# EAGLE board NuEVI (EAGLE 7.6.0)
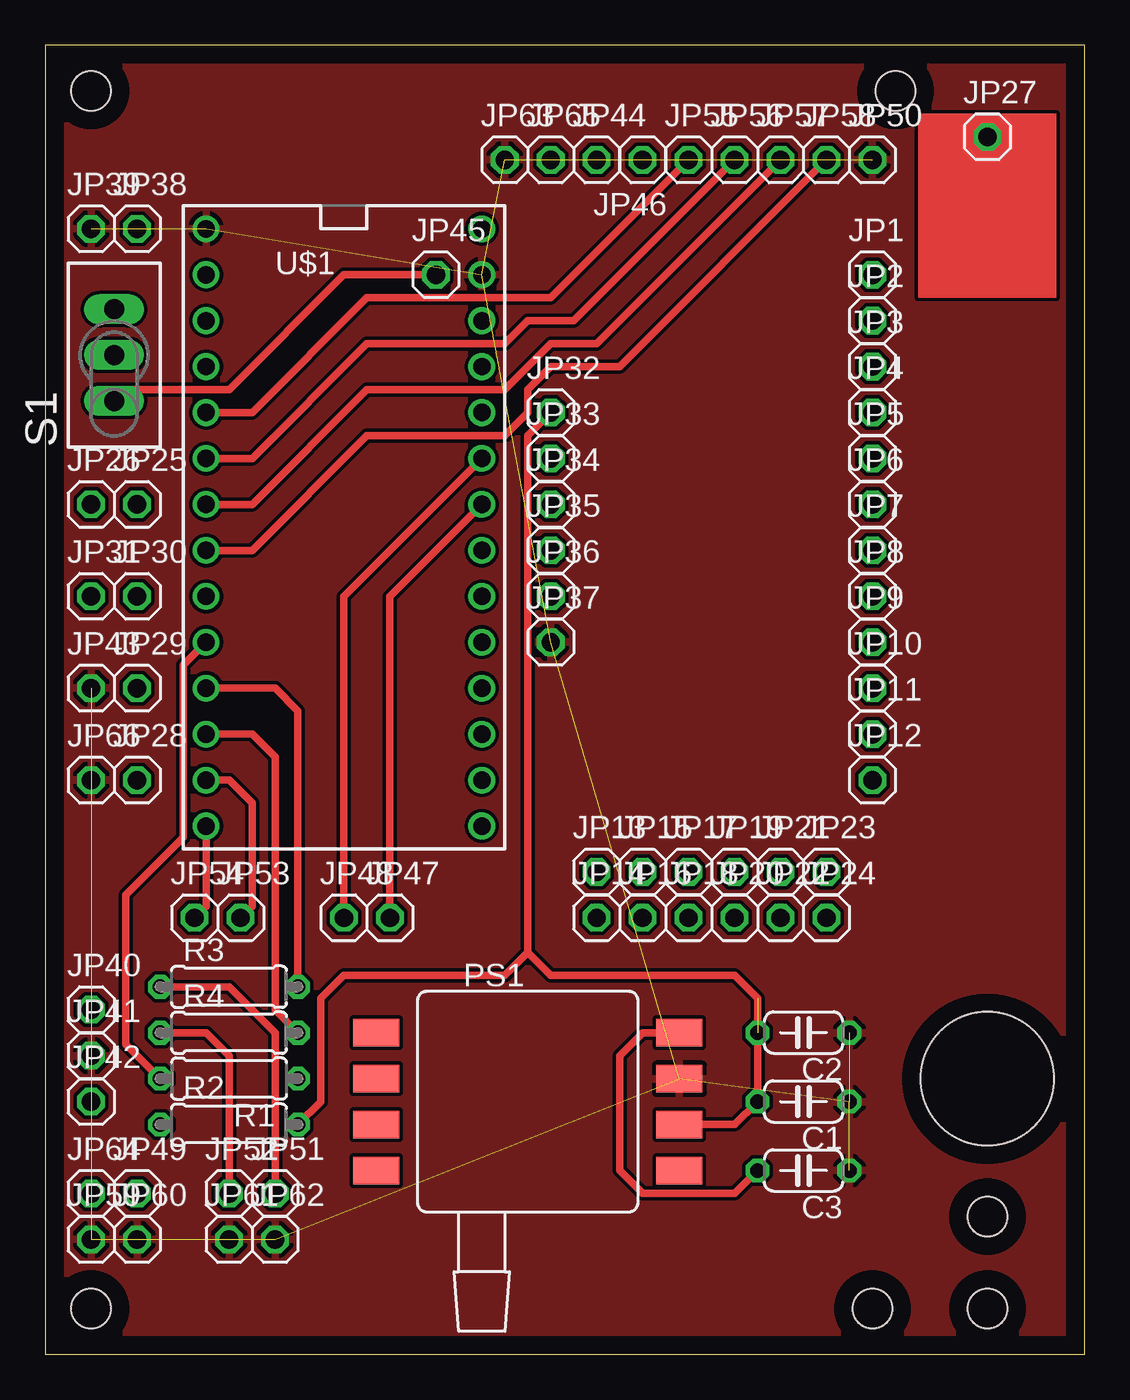
[diagram p0: board, top side]
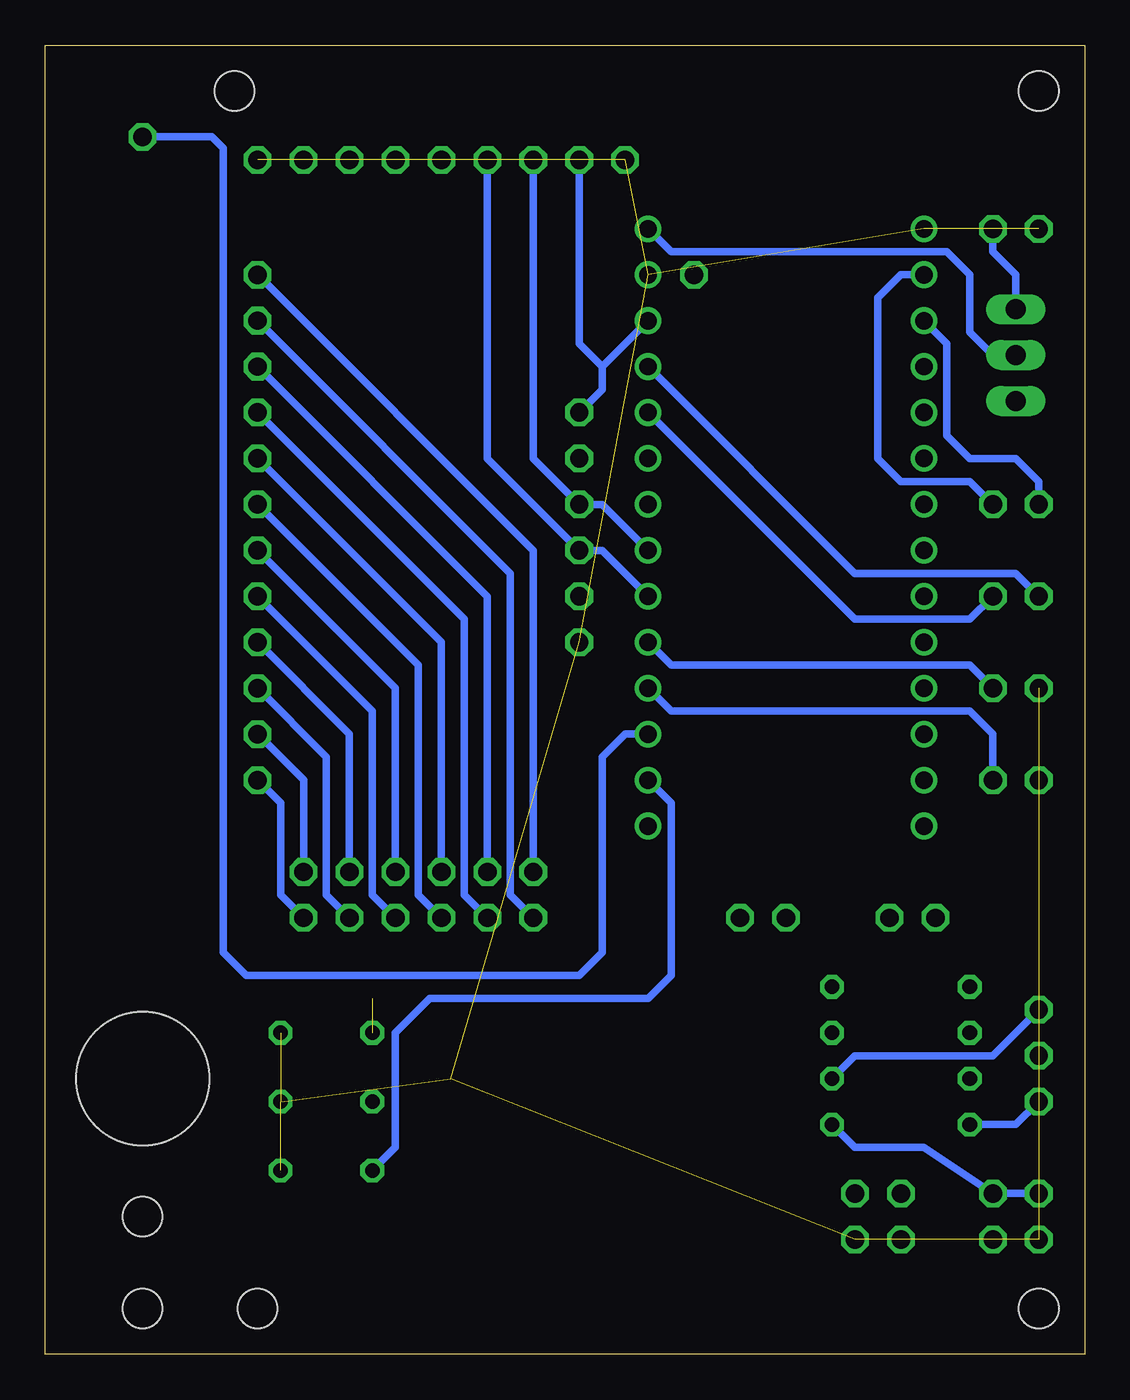
[diagram p1: board, bottom side, seen from below]

Size 57.45 x 72.38 mm. Coordinates in mm from the lower left corner, seen from the top.
Outline: 0,0 57.45,0 57.45,72.38 0,72.38 0,0
Copper layers (1*16): Top 0.035mm / dielectric 1.5mm / Bottom 0.035mm
Design rules "default": minimum track width 10mil, minimum drill 24mil, track to track 8mil, track to pad 8mil, pad to pad 8mil, via to via 8mil, smd to smd 8mil, copper to edge 40mil, drill to drill 8mil, minimum pad ring 10mil, minimum via ring 8mil, stop-mask expansion 4mil, vias tented up to drill 0mil, thermal gap 10mil
Holes 2.2 mm at 2.54,69.85 46.99,69.85 2.54,2.54 45.72,2.54 52.07,2.54 52.07,7.62
Holes 7.37 mm at 52.07,15.24

## Footprints (pad centres in the part's own frame; a part is rotated, then mirrored left to right if it is on the bottom)
C050-024X044 = drill 0.813 octagon: 1 -2.54,0; 2 2.54,0
1X01 = drill 1.016 octagon: 1 0,0
1369 = smd 2.54 x 1.524: 1 8.382,-3.81; 2 8.382,-1.27; 3 8.382,1.27; 4 8.382,3.81; 5 -8.382,3.81; 6 -8.382,1.27; 7 -8.382,-1.27; 8 -8.382,-3.81
0207/7 = drill 0.813 octagon: 1 -3.81,0; 2 3.81,0
TL3XPO = drill 1.1 pad 1.422 long: 1 -2.54,0; 2 0,0; 3 2.54,0
TEENSY_3.0-3.2&LC_DIL = drill 0.965: 0 -7.62,13.97; 1 -7.62,11.43; 2 -7.62,8.89; 3 -7.62,6.35; 3.3V 7.62,11.43; 4 -7.62,3.81; 5 -7.62,1.27; 6 -7.62,-1.27; 7 -7.62,-3.81; 8 -7.62,-6.35; 9 -7.62,-8.89; 10 -7.62,-11.43; 11 -7.62,-13.97; 12 -7.62,-16.51; 13 7.62,-16.51; 14/A0 7.62,-13.97; 15/A1 7.62,-11.43; 16/A2 7.62,-8.89; 17/A3 7.62,-6.35; 18/A4 7.62,-3.81; 19/A5 7.62,-1.27; 20/A6 7.62,1.27; 21/A7 7.62,3.81; 22/A8 7.62,6.35; 23/A9 7.62,8.89; AGND 7.62,13.97; GND -7.62,16.51; VIN 7.62,16.51

## Placement (x,y rotation side)
C1  0.01uF  [C050-024X044]  41.91,13.97 180 top
C2  1uF  [C050-024X044]  41.91,17.78 180 top
C3  470pF  [C050-024X044]  41.91,10.16 180 top
JP1  [1X01]  45.72,59.69 0 top
JP2  [1X01]  45.72,57.15 0 top
JP3  [1X01]  45.72,54.61 0 top
JP4  [1X01]  45.72,52.07 0 top
JP5  [1X01]  45.72,49.53 0 top
JP6  [1X01]  45.72,46.99 0 top
JP7  [1X01]  45.72,44.45 0 top
JP8  [1X01]  45.72,41.91 0 top
JP9  [1X01]  45.72,39.37 0 top
JP10  [1X01]  45.72,36.83 0 top
JP11  [1X01]  45.72,34.29 0 top
JP12  [1X01]  45.72,31.75 0 top
JP13  [1X01]  30.48,26.67 0 top
JP14  [1X01]  30.48,24.13 0 top
JP15  [1X01]  33.02,26.67 0 top
JP16  [1X01]  33.02,24.13 0 top
JP17  [1X01]  35.56,26.67 0 top
JP18  [1X01]  35.56,24.13 0 top
JP19  [1X01]  38.1,26.67 0 top
JP20  [1X01]  38.1,24.13 0 top
JP21  [1X01]  40.64,26.67 0 top
JP22  [1X01]  40.64,24.13 0 top
JP23  [1X01]  43.18,26.67 0 top
JP24  [1X01]  43.18,24.13 0 top
JP25  [1X01]  5.08,46.99 0 top
JP26  [1X01]  2.54,46.99 0 top
JP27  [1X01]  52.07,67.31 0 top
JP28  [1X01]  5.08,31.75 0 top
JP29  [1X01]  5.08,36.83 0 top
JP30  [1X01]  5.08,41.91 0 top
JP31  [1X01]  2.54,41.91 0 top
JP32  [1X01]  27.94,52.07 0 top
JP33  [1X01]  27.94,49.53 0 top
JP34  [1X01]  27.94,46.99 0 top
JP35  [1X01]  27.94,44.45 0 top
JP36  [1X01]  27.94,41.91 0 top
JP37  [1X01]  27.94,39.37 0 top
JP38  [1X01]  5.08,62.23 0 top
JP39  [1X01]  2.54,62.23 0 top
JP40  [1X01]  2.54,19.05 0 top
JP41  [1X01]  2.54,16.51 0 top
JP42  [1X01]  2.54,13.97 0 top
JP43  [1X01]  2.54,36.83 0 top
JP44  [1X01]  30.48,66.04 0 top
JP45  [1X01]  21.59,59.69 0 top
JP46  [1X01]  33.02,66.04 180 top
JP47  [1X01]  19.05,24.13 0 top
JP48  [1X01]  16.51,24.13 0 top
JP49  [1X01]  5.08,8.89 0 top
JP50  [1X01]  45.72,66.04 0 top
JP51  [1X01]  12.7,8.89 0 top
JP52  [1X01]  10.16,8.89 0 top
JP53  [1X01]  10.79,24.13 0 top
JP54  [1X01]  8.26,24.13 0 top
JP55  [1X01]  35.56,66.04 0 top
JP56  [1X01]  38.1,66.04 0 top
JP57  [1X01]  40.64,66.04 0 top
JP58  [1X01]  43.18,66.04 0 top
JP59  [1X01]  2.54,6.35 0 top
JP60  [1X01]  5.08,6.35 0 top
JP61  [1X01]  10.16,6.35 0 top
JP62  [1X01]  12.7,6.35 0 top
JP63  [1X01]  25.4,66.04 0 top
JP64  [1X01]  2.54,8.89 0 top
JP65  [1X01]  27.94,66.04 0 top
JP66  [1X01]  2.54,31.75 0 top
PS1  [1369]  26.67,13.97 0 top
R1  47  [0207/7]  10.16,15.24 180 top
R2  47  [0207/7]  10.16,12.7 0 top
R3  47  [0207/7]  10.16,20.32 0 top
R4  47  [0207/7]  10.16,17.78 0 top
S1  TL36PO  [TL3XPO]  3.81,55.24 90 top
U$1  TEENSY_LC_DIL  [TEENSY_3.0-3.2&LC_DIL]  16.51,45.72 0 top

## Library data of the parts
C1-C3 = rcl
JP1-JP66 = pinhead
PS1 = mpx-freescale
R1-R4 = resistor
S1 = switch
U$1 = Teensy_3_and_LC_Series_Boards_v1.4

## Nets
GND: C1.1 C2.1 C3.1 JP37.1 JP39.1 JP41.1 JP43.1 JP50.1 JP59.1 JP60.1 JP61.1 JP62.1 JP63.1 JP66.1 PS1.3 U$1.AGND U$1.GND
N$1: JP1.1 JP13.1
N$2: JP2.1 JP14.1
N$3: JP3.1 JP15.1
N$4: JP4.1 JP16.1
N$5: JP5.1 JP17.1
N$6: JP6.1 JP18.1
N$8: JP7.1 JP19.1
N$9: JP8.1 JP20.1
N$10: JP9.1 JP21.1
N$11: JP10.1 JP22.1
N$12: JP11.1 JP23.1
N$13: JP25.1 U$1.0
N$14: JP12.1 JP24.1
N$15: JP26.1 U$1.1
N$16: JP27.1 U$1.15/A1
N$17: JP28.1 U$1.16/A2
N$18: JP29.1 U$1.17/A3
N$19: JP30.1 U$1.22/A8
N$20: JP31.1 U$1.23/A9
N$21: C1.2 C2.2 JP32.1 JP49.1 JP64.1 JP65.1 PS1.2 R2.2 U$1.3.3V
N$22: JP47.1 U$1.20/A6
N$23: JP34.1 JP44.1 U$1.19/A5
N$24: JP35.1 JP46.1 U$1.18/A4
N$25: JP38.1 S1.3
N$26: R1.2 U$1.8
N$27: JP40.1 R1.1
N$28: JP42.1 R2.1
N$29: C3.2 PS1.4 U$1.14/A0
N$30: S1.2 U$1.VIN
N$31: JP48.1 U$1.21/A7
N$32: JP51.1 R3.1
N$33: JP52.1 R4.1
N$34: JP53.1 U$1.11
N$35: JP54.1 U$1.12
N$36: JP55.1 U$1.3
N$37: JP56.1 U$1.4
N$38: JP57.1 U$1.5
N$39: JP58.1 U$1.6
N$40: JP45.1 S1.1
N$41: R4.2 U$1.10
N$43: R3.2 U$1.9

## Tracks (layer width: path | path; a pad name or v marks a point on that pad's centre or on a via)
GND  (16 unrouted)
  pour Top: 0,72.39 57.78,72.39 57.78,0 0,0
N$1
  Bottom 0.406: JP13.1 30.48,44.45 JP1.1
N$2
  Bottom 0.406: JP14.1 31.75,25.4 31.75,43.18 JP2.1
N$3
  Bottom 0.406: JP15.1 33.02,41.91 JP3.1
N$4
  Bottom 0.406: JP16.1 34.29,25.4 34.29,40.64 JP4.1
N$5
  Bottom 0.406: JP17.1 35.56,39.37 JP5.1
N$6
  Bottom 0.406: JP18.1 36.83,25.4 36.83,38.1 JP6.1
N$8
  Bottom 0.406: JP19.1 38.1,36.83 JP7.1
N$9
  Bottom 0.406: JP20.1 39.37,25.4 39.37,35.56 JP8.1
N$10
  Bottom 0.406: JP21.1 40.64,34.29 JP9.1
N$11
  Bottom 0.406: JP22.1 41.91,25.4 41.91,33.02 JP10.1
N$12
  Bottom 0.406: JP23.1 43.18,31.75 JP11.1
N$13
  Bottom 0.406: JP25.1 6.35,48.26 10.16,48.26 11.43,49.53 11.43,58.42 10.16,59.69 U$1.0
N$14
  Bottom 0.406: JP24.1 44.45,25.4 44.45,30.48 JP12.1
N$15
  Bottom 0.406: U$1.1 7.62,55.88 7.62,50.8 6.35,49.53 3.81,49.53 2.54,48.26 JP26.1
N$16
  Bottom 0.406: U$1.15/A1 25.4,34.29 26.67,33.02 26.67,22.23 27.94,20.95 46.35,20.95 47.62,22.23 47.62,66.67 48.26,67.31 JP27.1
N$17
  Bottom 0.406: U$1.16/A2 22.86,35.56 6.35,35.56 5.08,34.29 JP28.1
N$18
  Bottom 0.406: JP29.1 6.35,38.1 22.86,38.1 U$1.17/A3
N$19
  Bottom 0.406: JP30.1 6.35,40.64 12.7,40.64 U$1.22/A8
N$20
  Bottom 0.406: JP31.1 3.81,43.18 12.7,43.18 U$1.23/A9
N$21  (1 unrouted)
  Top 0.406: JP32.1 26.67,50.8 26.67,22.23 | R2.2 15.24,13.97 15.24,19.68 16.51,20.95 25.4,20.95 26.67,22.23 | PS1.2 38.1,12.7 C1.2 39.37,19.68 38.1,20.95 27.94,20.95 26.67,22.23
  Bottom 0.406: U$1.3.3V 26.67,54.61 | 26.67,54.61 26.67,53.34 JP32.1 | JP65.1 27.94,55.88 26.67,54.61 | R2.2 12.7,11.43 8.89,11.43 JP49.1 JP64.1
N$22
  Top 0.406: U$1.20/A6 19.05,41.91 JP47.1
N$23
  Bottom 0.406: U$1.19/A5 26.67,46.99 JP34.1 30.48,49.53 JP44.1
N$24
  Bottom 0.406: U$1.18/A4 26.67,44.45 JP35.1 33.02,49.53 JP46.1
N$25
  Bottom 0.406: JP38.1 5.08,60.96 3.81,59.69 S1.3
N$26
  Top 0.406: U$1.8 7.62,38.1 7.62,28.57 4.45,25.4 4.45,17.14 R1.2
N$27
  Bottom 0.406: R1.1 12.7,16.51 5.08,16.51 JP40.1
N$28
  Bottom 0.406: R2.1 3.81,12.7 JP42.1
N$29
  Top 0.406: PS1.4 33.02,17.78 31.75,16.51 31.75,10.16 33.02,8.89 38.1,8.89 C3.2
  Bottom 0.406: U$1.14/A0 22.86,30.48 22.86,20.95 24.13,19.68 36.2,19.68 38.1,17.78 38.1,11.43 C3.2
N$30
  Bottom 0.406: S1.2 5.08,55.24 6.35,56.52 6.35,59.69 7.62,60.96 22.86,60.96 U$1.VIN
N$31
  Top 0.406: U$1.21/A7 16.51,41.91 JP48.1
N$32
  Top 0.406: R3.1 10.16,20.32 12.7,17.78 JP51.1
N$33
  Top 0.406: R4.1 8.89,17.78 10.16,16.51 JP52.1
N$34
  Top 0.406: U$1.11 10.16,31.75 11.43,30.48 11.43,24.77 JP53.1
N$35
  Top 0.406: U$1.12 8.89,24.77 JP54.1
N$36
  Top 0.406: U$1.3 11.43,52.07 17.78,58.42 27.94,58.42 JP55.1
N$37
  Top 0.406: U$1.4 11.43,49.53 17.78,55.88 25.4,55.88 26.67,57.15 29.21,57.15 JP56.1
N$38
  Top 0.406: U$1.5 11.43,46.99 17.78,53.34 25.4,53.34 27.94,55.88 30.48,55.88 JP57.1
N$39
  Top 0.406: U$1.6 11.43,44.45 17.78,50.8 25.4,50.8 26.67,52.07 26.67,53.34 27.94,54.61 31.75,54.61 JP58.1
N$40
  Top 0.406: JP45.1 16.51,59.69 10.16,53.34 4.45,53.34 S1.1
N$41
  Top 0.406: U$1.10 11.43,34.29 12.7,33.02 12.7,19.05 R4.2
N$43
  Top 0.406: U$1.9 12.7,36.83 13.97,35.56 R3.2
(copper drawn outside any net)
  shapes: Top area x1

## Text on the board
tScreen: Johan Berglund 2017 | OLED | NAV | NuEVI main board | VIBRATO | GND | SCL | D | E | U | M | BATT | USB | - | + | Vcc | SDA | GND | PWR | VUSB | MPR121 | TEENSY | S1 | S2 | Pu | Pd | BITE | GND | EC | R2 | R4 | K4 | K2 | K5 | K7 | AUX | AUX | TOUCH | 12 | 11 | A7 | A6 | R1 | R3 | R5 | K1 | K3 | K6 | MIDI | 100 | R6 | S | 100 | G | 47 | 103 | + | 47 | 105 | Vcc | LED | MP3V5004GP | B | P | 471 | GND | GND